# EAGLE board registers_half_layout (EAGLE 9.5.2)
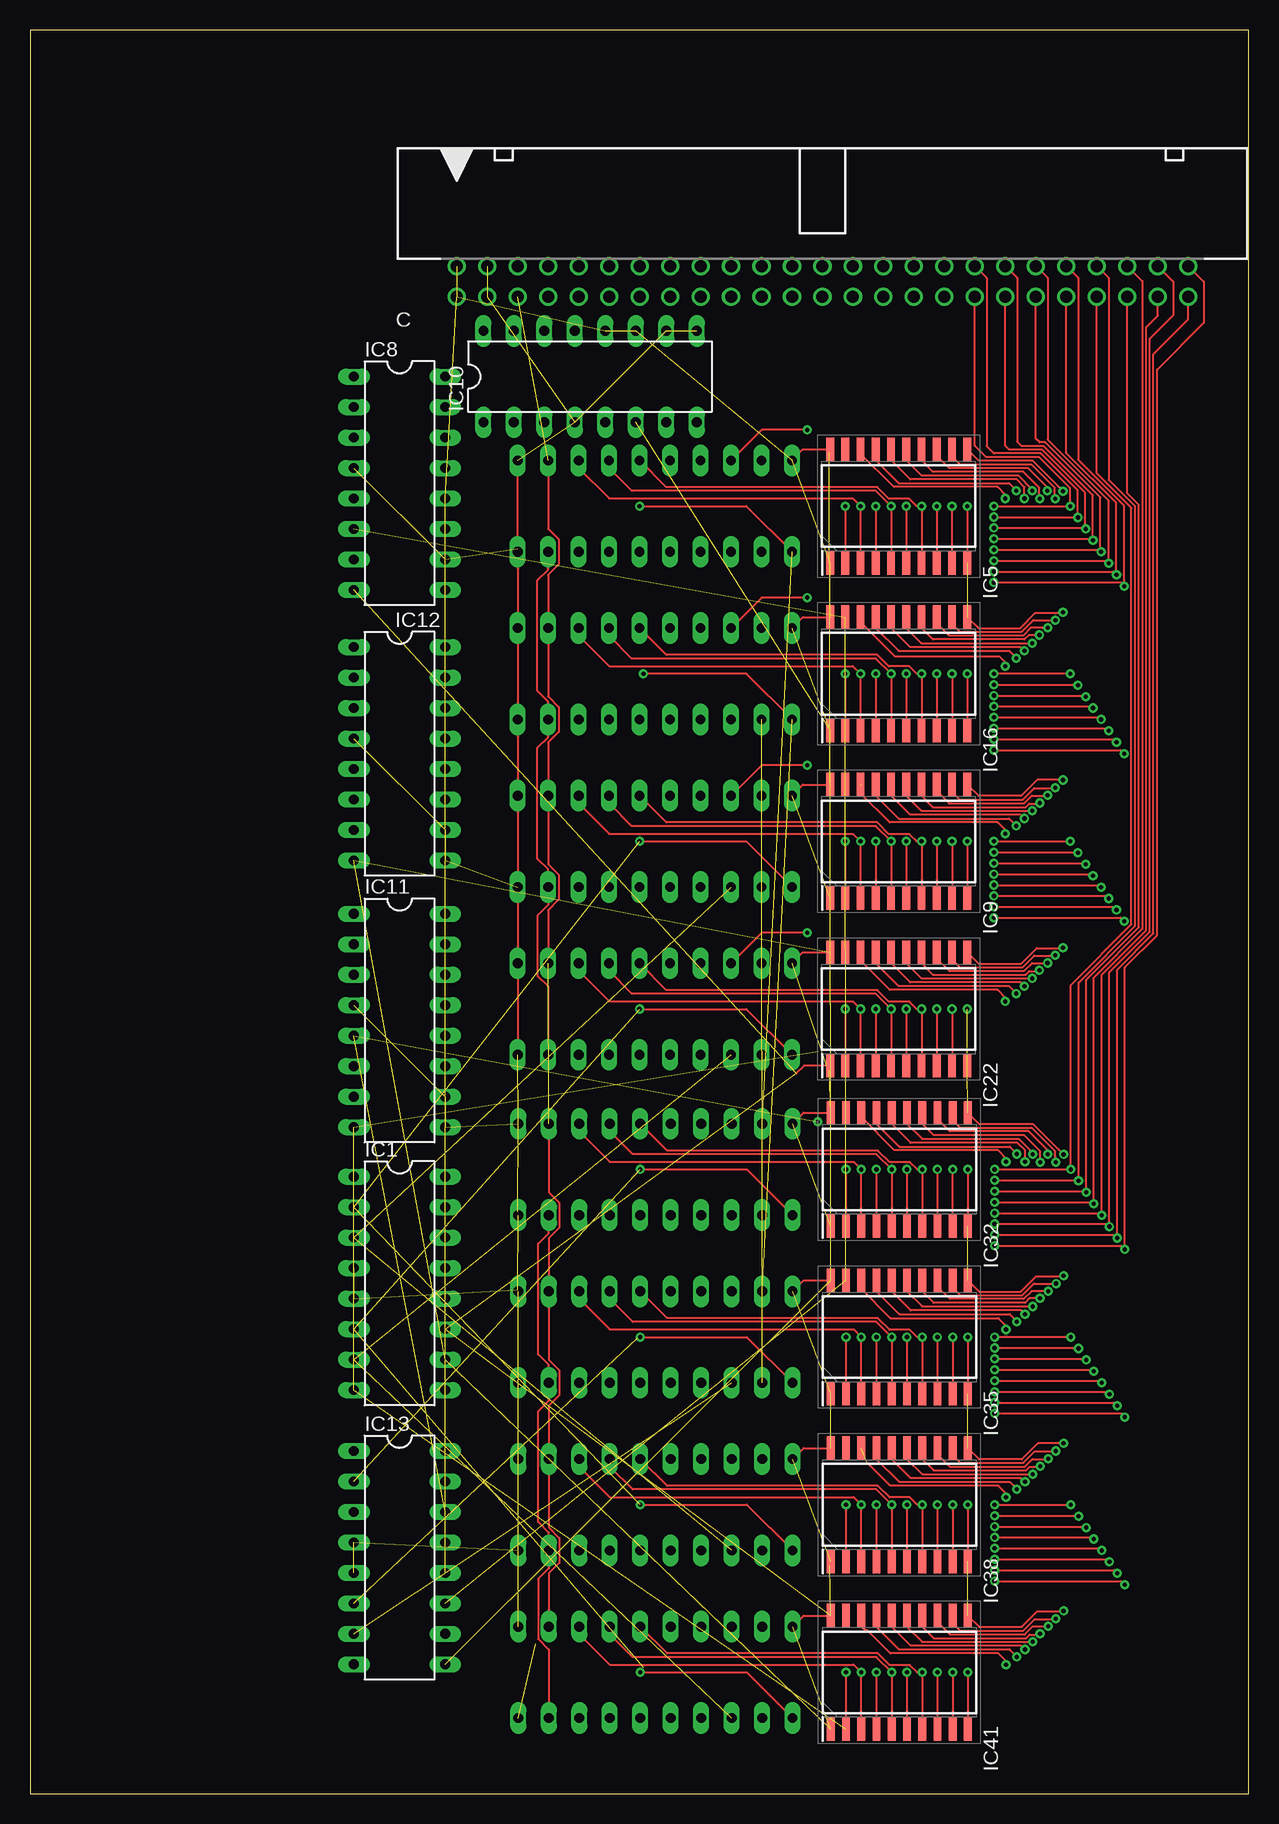
[diagram p0: board, top side]
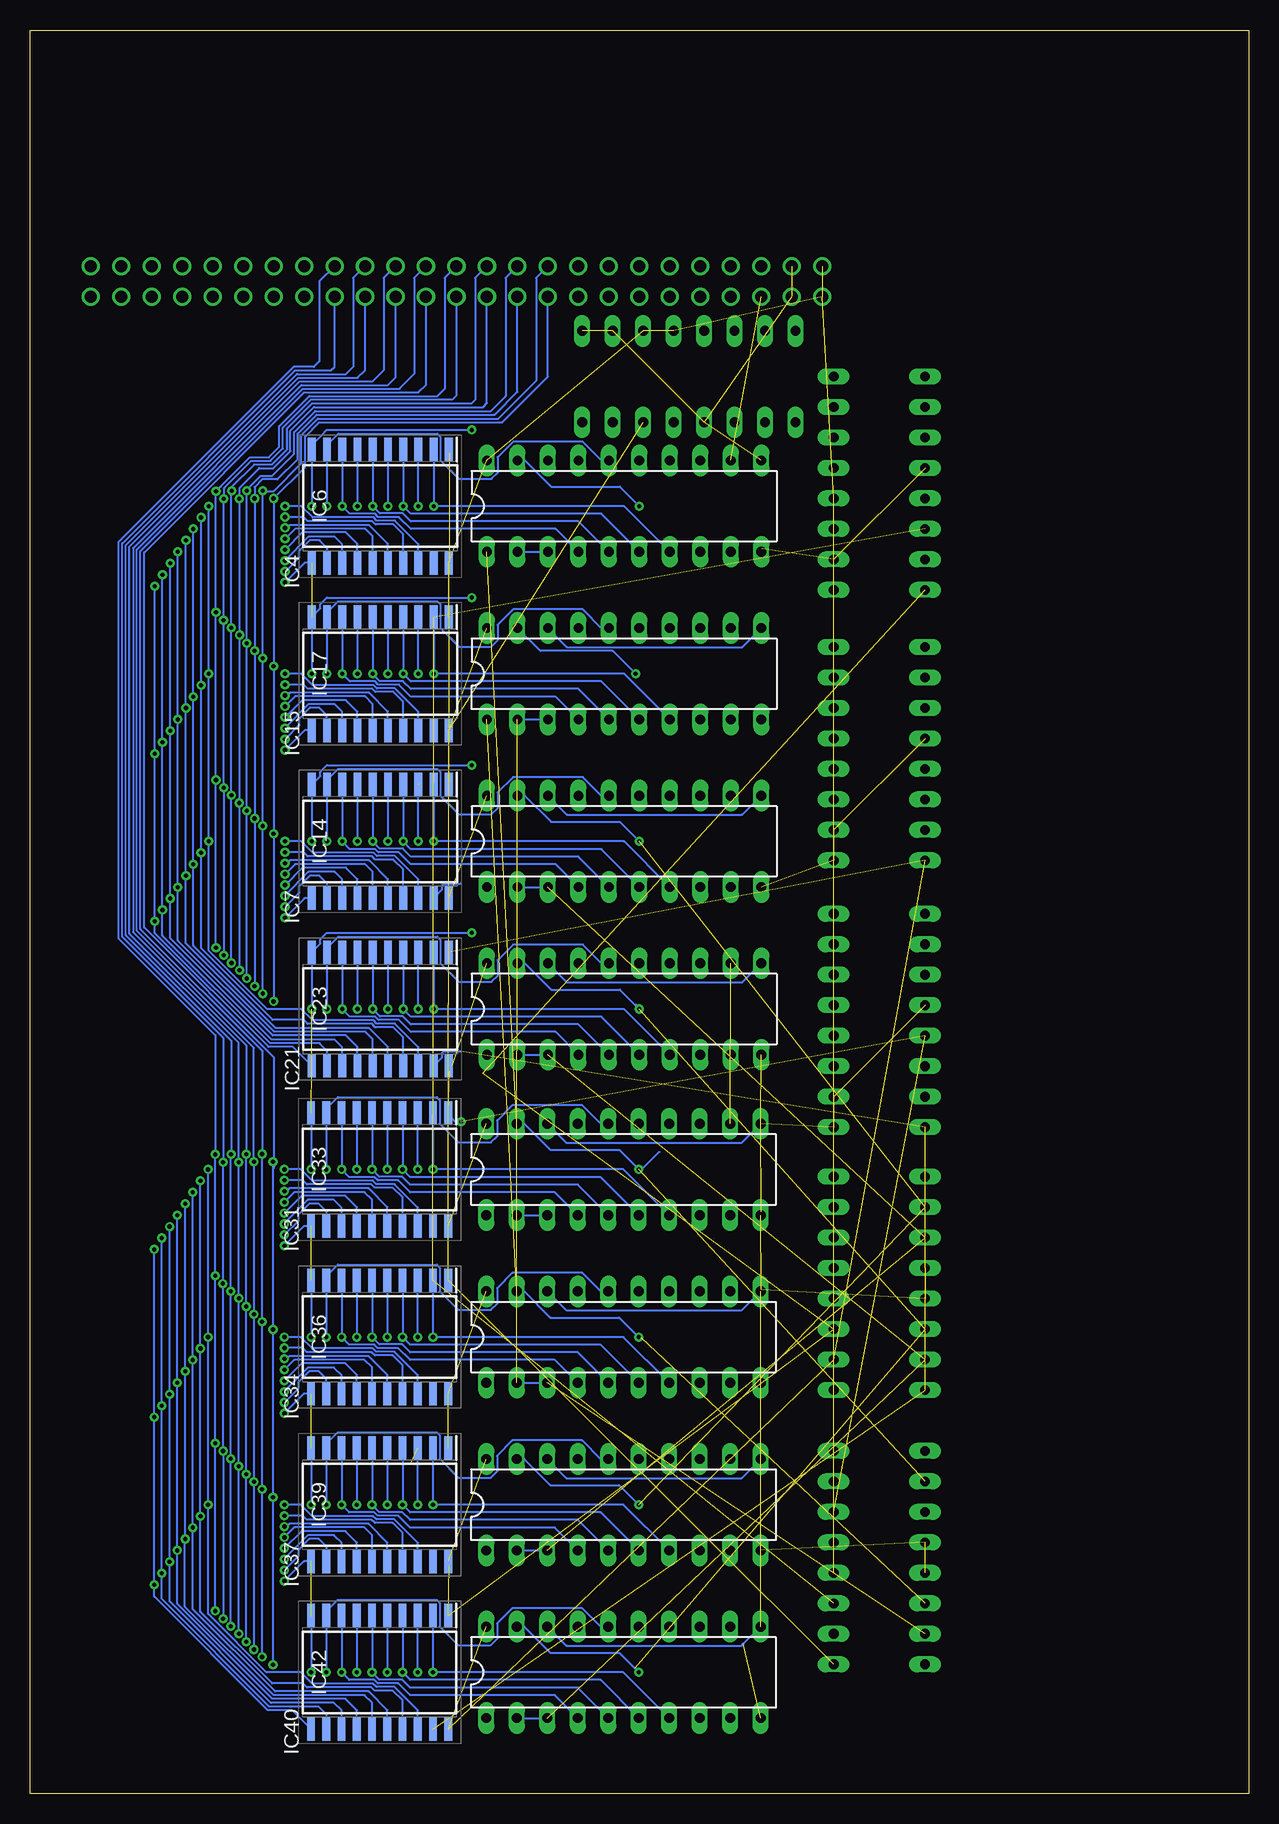
[diagram p1: board, bottom side, seen from below]

Size 101.58 x 146.99 mm. Coordinates in mm from the lower left corner, seen from the top.
Outline: 0,0 101.58,0 101.58,146.99 0,146.99 0,0
Copper layers (1*16): Top 0.035mm / dielectric 1.5mm / Bottom 0.035mm
Design rules "default *": minimum track width 6mil, minimum drill 0.35mm, track to track 6mil, track to pad 6mil, pad to pad 6mil, via to via 6mil, smd to smd 6mil, copper to edge 40mil, drill to drill 6mil, minimum pad ring 10mil, minimum via ring 8mil, stop-mask expansion 4mil, vias tented up to drill 0mil, thermal gap 10mil

## Footprints (pad centres in the part's own frame; a part is rotated, then mirrored left to right if it is on the bottom)
PAK100/2500-5-50 = drill 1 pad 1.422: 1 -30.48,-1.27; 2 -30.48,1.27; 3 -27.94,-1.27; 4 -27.94,1.27; 5 -25.4,-1.27; 6 -25.4,1.27; 7 -22.86,-1.27; 8 -22.86,1.27; 9 -20.32,-1.27; 10 -20.32,1.27; 11 -17.78,-1.27; 12 -17.78,1.27; 13 -15.24,-1.27; 14 -15.24,1.27; 15 -12.7,-1.27; 16 -12.7,1.27; 17 -10.16,-1.27; 18 -10.16,1.27; 19 -7.62,-1.27; 20 -7.62,1.27; 21 -5.08,-1.27; 22 -5.08,1.27; 23 -2.54,-1.27; 24 -2.54,1.27; 25 0,-1.27; 26 0,1.27; 27 2.54,-1.27; 28 2.54,1.27; 29 5.08,-1.27; 30 5.08,1.27; 31 7.62,-1.27; 32 7.62,1.27; 33 10.16,-1.27; 34 10.16,1.27; 35 12.7,-1.27; 36 12.7,1.27; 37 15.24,-1.27; 38 15.24,1.27; 39 17.78,-1.27; 40 17.78,1.27; 41 20.32,-1.27; 42 20.32,1.27; 43 22.86,-1.27; 44 22.86,1.27; 45 25.4,-1.27; 46 25.4,1.27; 47 27.94,-1.27; 48 27.94,1.27; 49 30.48,-1.27; 50 30.48,1.27
DIL16 = drill 0.813 long: 1 -8.89,-3.81; 2 -6.35,-3.81; 3 -3.81,-3.81; 4 -1.27,-3.81; 5 1.27,-3.81; 6 3.81,-3.81; 7 6.35,-3.81; 8 8.89,-3.81; 9 8.89,3.81; 10 6.35,3.81; 11 3.81,3.81; 12 1.27,3.81; 13 -1.27,3.81; 14 -3.81,3.81; 15 -6.35,3.81; 16 -8.89,3.81
DIL20 = drill 0.813 long: 1 -11.43,-3.81; 2 -8.89,-3.81; 3 -6.35,-3.81; 4 -3.81,-3.81; 5 -1.27,-3.81; 6 1.27,-3.81; 7 3.81,-3.81; 8 6.35,-3.81; 9 8.89,-3.81; 10 11.43,-3.81; 11 11.43,3.81; 12 8.89,3.81; 13 6.35,3.81; 14 3.81,3.81; 15 1.27,3.81; 16 -1.27,3.81; 17 -3.81,3.81; 18 -6.35,3.81; 19 -8.89,3.81; 20 -11.43,3.81
SOIC127P1030X265-20N = smd 1.95 x 0.65: 1 -4.725,5.715; 2 -4.725,4.445; 3 -4.725,3.175; 4 -4.725,1.905; 5 -4.725,0.635; 6 -4.725,-0.635; 7 -4.725,-1.905; 8 -4.725,-3.175; 9 -4.725,-4.445; 10 -4.725,-5.715; 11 4.725,-5.715; 12 4.725,-4.445; 13 4.725,-3.175; 14 4.725,-1.905; 15 4.725,-0.635; 16 4.725,0.635; 17 4.725,1.905; 18 4.725,3.175; 19 4.725,4.445; 20 4.725,5.715

## Placement (x,y rotation side)
C  2550-5  [PAK100/2500-5-50]  66.04,126.05 0 top
IC1  74AC11032  [DIL16]  30.8,42.55 270 top
IC4  74HCT299N  [DIL20]  52.07,107.31 0 bottom
IC5  SN74CBT3345DW  [SOIC127P1030X265-20N]  72.39,107.31 90 top
IC6  SN74CBT3345DW  [SOIC127P1030X265-20N]  72.39,107.31 270 bottom
IC7  74HCT299N  [DIL20]  52.07,79.38 0 bottom
IC8  74AC11138  [DIL16]  30.8,109.22 270 top
IC9  SN74CBT3345DW  [SOIC127P1030X265-20N]  72.39,79.38 90 top
IC10  74AC11238  [DIL16]  46.67,118.11 0 top
IC11  74AC11238  [DIL16]  30.8,64.45 270 top
IC12  74AC11138  [DIL16]  30.8,86.68 270 top
IC13  74AC11032  [DIL16]  30.8,19.68 270 top
IC14  SN74CBT3345DW  [SOIC127P1030X265-20N]  72.39,79.38 270 bottom
IC15  74HCT299N  [DIL20]  52.07,93.34 0 bottom
IC16  SN74CBT3345DW  [SOIC127P1030X265-20N]  72.39,93.34 90 top
IC17  SN74CBT3345DW  [SOIC127P1030X265-20N]  72.39,93.34 270 bottom
IC21  74HCT299N  [DIL20]  52.07,65.41 0 bottom
IC22  SN74CBT3345DW  [SOIC127P1030X265-20N]  72.39,65.41 90 top
IC23  SN74CBT3345DW  [SOIC127P1030X265-20N]  72.39,65.41 270 bottom
IC31  74HCT299N  [DIL20]  52.12,52.04 0 bottom
IC32  SN74CBT3345DW  [SOIC127P1030X265-20N]  72.44,52.04 90 top
IC33  SN74CBT3345DW  [SOIC127P1030X265-20N]  72.44,52.04 270 bottom
IC34  74HCT299N  [DIL20]  52.12,38.07 0 bottom
IC35  SN74CBT3345DW  [SOIC127P1030X265-20N]  72.44,38.07 90 top
IC36  SN74CBT3345DW  [SOIC127P1030X265-20N]  72.44,38.07 270 bottom
IC37  74HCT299N  [DIL20]  52.12,24.1 0 bottom
IC38  SN74CBT3345DW  [SOIC127P1030X265-20N]  72.44,24.1 90 top
IC39  SN74CBT3345DW  [SOIC127P1030X265-20N]  72.44,24.1 270 bottom
IC40  74HCT299N  [DIL20]  52.12,10.13 0 bottom
IC41  SN74CBT3345DW  [SOIC127P1030X265-20N]  72.44,10.13 90 top
IC42  SN74CBT3345DW  [SOIC127P1030X265-20N]  72.44,10.13 270 bottom

## Library data of the parts
C = con-3m; OC_FARNELL: 1788696; OC_NEWARK: unknown
IC1 IC8 IC10-IC13 = 74ac-logic
IC4 IC7 IC15 IC21 IC31 IC34 IC37 IC40 = 74xx-eu
IC5 IC6 IC9 IC14 IC16 IC17 IC22 IC23 IC32 IC33 IC35 IC36 IC38 IC39 IC41 IC42 = SamacSys_Parts; DESCRIPTION: Texas Instruments SN74CBT3345DW, Bus Switch, 8 x 1:1, 4.5 5.5 V, 20-Pin SOIC; HEIGHT: 2.65mm; MANUFACTURER_NAME: Texas Instruments; MANUFACTURER_PART_NUMBER: SN74CBT3345DW

## Nets
BUSA_BIT0: C.19 IC5.18 IC9.18 IC16.18 IC22.18
BUSA_BIT1: C.20 IC5.17 IC9.17 IC16.17 IC22.17
BUSA_BIT2: C.21 IC5.16 IC9.16 IC16.16 IC22.16
BUSA_BIT3: C.22 IC5.15 IC9.15 IC16.15 IC22.15
BUSA_BIT4: C.23 IC5.14 IC9.14 IC16.14 IC22.14
BUSA_BIT5: C.24 IC5.13 IC9.13 IC16.13 IC22.13
BUSA_BIT6: C.25 IC5.12 IC9.12 IC16.12 IC22.12
BUSA_BIT7: C.26 IC5.11 IC9.11 IC16.11 IC22.11
BUSA_BIT8: C.27 IC32.18 IC35.18 IC38.18 IC41.18
BUSA_BIT9: C.28 IC32.17 IC35.17 IC38.17 IC41.17
BUSA_BIT10: C.29 IC32.16 IC35.16 IC38.16 IC41.16
BUSA_BIT11: C.30 IC32.15 IC35.15 IC38.15 IC41.15
BUSA_BIT12: C.31 IC32.14 IC35.14 IC38.14 IC41.14
BUSA_BIT13: C.32 IC32.13 IC35.13 IC38.13 IC41.13
BUSA_BIT14: C.33 IC32.12 IC35.12 IC38.12 IC41.12
BUSA_BIT15: C.34 IC32.11 IC35.11 IC38.11 IC41.11
BUSA_REGIN0: C.7 IC8.15
BUSA_REGIN1: C.9 IC8.14
BUSA_REGIN2: C.11 IC8.13
BUSA_REGOUT0: C.13 IC10.15
BUSA_REGOUT1: C.15 IC10.14
BUSA_REGOUT2: C.17 IC10.13
BUSB_BIT0: C.35 IC6.18 IC14.18 IC17.18 IC23.18
BUSB_BIT1: C.36 IC6.17 IC14.17 IC17.17 IC23.17
BUSB_BIT2: C.37 IC6.16 IC14.16 IC17.16 IC23.16
BUSB_BIT3: C.38 IC6.15 IC14.15 IC17.15 IC23.15
BUSB_BIT4: C.39 IC6.14 IC14.14 IC17.14 IC23.14
BUSB_BIT5: C.40 IC6.13 IC14.13 IC17.13 IC23.13
BUSB_BIT6: C.41 IC6.12 IC14.12 IC17.12 IC23.12
BUSB_BIT7: C.42 IC6.11 IC14.11 IC17.11 IC23.11
BUSB_BIT8: C.43 IC33.18 IC36.18 IC39.18 IC42.18
BUSB_BIT9: C.44 IC33.17 IC36.17 IC39.17 IC42.17
BUSB_BIT10: C.45 IC33.16 IC36.16 IC39.16 IC42.16
BUSB_BIT11: C.46 IC33.15 IC36.15 IC39.15 IC42.15
BUSB_BIT12: C.47 IC33.14 IC36.14 IC39.14 IC42.14
BUSB_BIT13: C.48 IC33.13 IC36.13 IC39.13 IC42.13
BUSB_BIT14: C.49 IC33.12 IC36.12 IC39.12 IC42.12
BUSB_BIT15: C.50 IC33.11 IC36.11 IC39.11 IC42.11
BUSB_REGIN0: C.8 IC12.15
BUSB_REGIN1: C.10 IC12.14
BUSB_REGIN2: C.12 IC12.13
BUSB_REGOUT0: C.14 IC11.15
BUSB_REGOUT1: C.16 IC11.14
BUSB_REGOUT2: C.18 IC11.13
CLK: C.5 IC4.12 IC7.12 IC15.12 IC21.12 IC31.12 IC34.12 IC37.12 IC40.12
GND: C.3 C.4 IC1.4 IC1.5 IC4.10 IC4.11 IC4.18 IC5.10 IC6.10 IC7.10 IC7.11 IC7.18 IC8.4 IC8.9 IC8.10 IC9.10 IC10.4 IC10.9 IC10.10 IC11.4 IC11.9 IC11.10 IC12.4 IC12.9 IC12.10 IC13.4 IC13.5 IC14.10 IC15.10 IC15.11 IC15.18 IC16.10 IC17.10 IC21.10 IC21.11 IC21.18 IC22.10 IC23.10 IC31.10 IC31.11 IC31.18 IC32.10 IC33.10 IC34.10 IC34.11 IC34.18 IC35.10 IC36.10 IC37.10 IC37.11 IC37.18 IC38.10 IC39.10 IC40.10 IC40.11 IC40.18 IC41.10 IC42.10
N$1: IC34.16 IC35.9 IC36.9
N$2: IC1.8 IC11.8 IC23.19 IC42.19
N$5: IC4.7 IC5.2 IC6.2
N$6: IC4.13 IC5.3 IC6.3
N$7: IC4.6 IC5.4 IC6.4
N$8: IC4.14 IC5.5 IC6.5
N$9: IC4.5 IC5.6 IC6.6
N$10: IC4.15 IC5.7 IC6.7
N$11: IC4.4 IC5.8 IC6.8
N$15: IC4.16 IC5.9 IC6.9
N$22: IC7.7 IC9.2 IC14.2
N$23: IC7.13 IC9.3 IC14.3
N$24: IC7.6 IC9.4 IC14.4
N$25: IC7.14 IC9.5 IC14.5
N$28: IC7.5 IC9.6 IC14.6
N$34: IC5.1 IC10.5 IC13.15 IC32.1
N$35: IC7.15 IC9.7 IC14.7
N$36: IC7.4 IC9.8 IC14.8
N$37: IC7.16 IC9.9 IC14.9
N$41: IC15.7 IC16.2 IC17.2
N$42: IC15.13 IC16.3 IC17.3
N$43: IC15.6 IC16.4 IC17.4
N$44: IC15.14 IC16.5 IC17.5
N$45: IC15.5 IC16.6 IC17.6
N$46: IC15.15 IC16.7 IC17.7
N$47: IC15.4 IC16.8 IC17.8
N$48: IC15.16 IC16.9 IC17.9
N$63: IC21.7 IC22.2 IC23.2
N$64: IC21.13 IC22.3 IC23.3
N$65: IC21.6 IC22.4 IC23.4
N$66: IC21.14 IC22.5 IC23.5
N$67: IC21.5 IC22.6 IC23.6
N$68: IC21.15 IC22.7 IC23.7
N$69: IC21.4 IC22.8 IC23.8
N$70: IC21.16 IC22.9 IC23.9
N$120: IC5.19 IC8.5 IC13.1 IC32.19
N$121: IC31.7 IC32.2 IC33.2
N$122: IC31.13 IC32.3 IC33.3
N$124: IC6.19 IC12.5 IC13.16 IC33.19
N$125: IC31.6 IC32.4 IC33.4
N$126: IC31.14 IC32.5 IC33.5
N$127: IC4.2 IC4.3 IC13.3 IC31.2 IC31.3
N$128: IC4.1 IC4.19 IC13.2 IC31.1 IC31.19
N$129: IC31.5 IC32.6 IC33.6
N$130: IC31.15 IC32.7 IC33.7
N$131: IC31.4 IC32.8 IC33.8
N$132: IC31.16 IC32.9 IC33.9
N$133: IC34.7 IC35.2 IC36.2
N$134: IC34.13 IC35.3 IC36.3
N$135: IC34.6 IC35.4 IC36.4
N$136: IC34.14 IC35.5 IC36.5
N$137: IC13.7 IC15.2 IC15.3 IC34.2 IC34.3
N$138: IC13.6 IC15.1 IC15.19 IC34.1 IC34.19
N$139: IC34.5 IC35.6 IC36.6
N$140: IC34.15 IC35.7 IC36.7
N$141: IC34.4 IC35.8 IC36.8
N$143: IC37.7 IC38.2 IC39.2
N$144: IC37.13 IC38.3 IC39.3
N$145: IC37.6 IC38.4 IC39.4
N$146: IC37.14 IC38.5 IC39.5
N$147: IC1.3 IC7.2 IC7.3 IC37.2 IC37.3
N$148: IC1.2 IC7.1 IC7.19 IC37.1 IC37.19
N$149: IC37.5 IC38.6 IC39.6
N$150: IC37.15 IC38.7 IC39.7
N$151: IC37.4 IC38.8 IC39.8
N$152: IC37.16 IC38.9 IC39.9
N$153: IC40.7 IC41.2 IC42.2
N$154: IC40.13 IC41.3 IC42.3
N$155: IC40.6 IC41.4 IC42.4
N$156: IC40.14 IC41.5 IC42.5
N$157: IC1.7 IC21.2 IC21.3 IC40.2 IC40.3
N$158: IC1.6 IC21.1 IC21.19 IC40.1 IC40.19
N$159: IC40.5 IC41.6 IC42.6
N$160: IC40.15 IC41.7 IC42.7
N$161: IC40.4 IC41.8 IC42.8
N$162: IC40.16 IC41.9 IC42.9
N$163: IC6.1 IC11.5 IC13.14 IC33.1
N$167: IC8.6 IC13.11 IC16.19 IC35.19
N$168: IC12.6 IC13.10 IC17.19 IC36.19
N$169: IC10.6 IC13.9 IC16.1 IC36.1
N$170: IC11.6 IC13.8 IC17.1 IC35.1
N$171: IC1.1 IC8.7 IC9.1 IC38.1
N$172: IC1.16 IC12.7 IC14.1 IC39.1
N$173: IC1.15 IC9.19 IC10.7 IC38.19
N$174: IC1.14 IC11.7 IC14.19 IC39.19
N$176: IC1.9 IC10.8 IC22.19 IC41.19
N$178: IC1.10 IC12.8 IC23.1 IC41.1
N$207: IC1.11 IC8.8 IC22.1 IC42.1
STARTUP: C.6 IC4.9 IC7.9 IC15.9 IC21.9 IC31.9 IC34.9 IC37.9 IC40.9
VCC: C.1 C.2 IC1.12 IC1.13 IC4.20 IC5.20 IC6.20 IC7.20 IC8.11 IC8.12 IC9.20 IC10.11 IC10.12 IC11.11 IC11.12 IC12.11 IC12.12 IC13.12 IC13.13 IC14.20 IC15.20 IC16.20 IC17.20 IC21.20 IC22.20 IC23.20 IC31.20 IC32.20 IC33.20 IC34.20 IC35.20 IC36.20 IC37.20 IC38.20 IC39.20 IC40.20 IC41.20 IC42.20

## Tracks (layer width: path | path; a pad name or v marks a point on that pad's centre or on a via)
BUSA_BIT0  (via drill 0.35)  (1 unrouted)
  Top 0.152: v81.28,107.95 81.28,108.27 80.63,108.92 71.99,108.92 69.12,111.78 69.09,111.78 IC5.18 | v81.28,93.98 81.28,94.3 80.8,94.77 72.09,94.77 69.09,97.78 IC16.18 | v81.28,80.01 81.28,80.33 80.64,80.96 71.64,80.96 69.2,83.41 69.2,84.12 | v81.28,66.04 81.28,66.36 80.64,66.99 71.64,66.99 69.22,69.42 IC22.18
  Bottom 0.152: v81.28,66.04 v81.28,80.01 v81.28,93.98 v81.28,107.95 78.66,110.57 78.66,113.11 77.47,114.3 62.23,114.3 58.42,118.11 C.19
BUSA_BIT1  (via drill 0.35)
  Top 0.152: v82.19,108.6 82.19,108.63 81.6,109.22 72.39,109.22 70.48,111.12 IC5.17 | v82.19,94.63 82.19,94.66 81.6,95.25 72.39,95.25 70.48,97.16 IC16.17 | v82.19,80.66 82.19,80.69 81.6,81.28 72.39,81.28 70.48,83.19 IC9.17 | v82.19,66.69 82.19,66.72 81.6,67.31 72.39,67.31 70.48,69.22 IC22.17
  Bottom 0.152: v82.19,66.69 v82.19,80.66 v82.19,94.63 v82.19,108.6 82.14,108.56 81.28,108.56 78.96,110.87 78.96,113.24 77.59,114.61 62.55,114.61 59.4,117.75 59.4,126.33 C.20
BUSA_BIT2  (via drill 0.35)
  Top 0.152: v82.87,107.95 82.87,108.9 82.23,109.54 73.34,109.54 71.75,111.12 IC5.16 | v82.87,95.25 82.55,95.57 73.34,95.57 71.75,97.16 IC16.16 | v82.87,81.28 82.55,81.6 73.34,81.6 71.75,83.19 IC9.16 | v82.87,67.31 82.55,67.63 73.34,67.63 71.75,69.22 IC22.16
  Bottom 0.152: v82.87,67.31 v82.87,81.28 v82.87,95.25 v82.87,107.95 82.87,108.9 82.23,109.54 80.96,109.54 79.27,111.23 79.27,113.36 77.69,114.94 62.87,114.94 60.96,116.84 C.21
BUSA_BIT3  (via drill 0.35)
  Top 0.152: IC5.15 73.03,111.12 74.28,109.87 82.33,109.87 83.51,108.69 v83.51,108.59 | IC16.15 73.03,97.16 74.28,95.9 v83.5,95.9 v83.51,95.89 | IC9.15 73.03,83.19 74.28,81.93 v83.5,81.93 v83.51,81.92 | IC22.15 73.03,69.22 74.29,67.95 v83.51,67.95
  Bottom 0.152: C.22 61.94,126.33 61.94,116.48 63.18,115.24 77.82,115.24 79.57,113.49 79.57,111.68 81.41,109.84 82.36,109.84 83.51,108.69 v83.51,108.59 v83.51,95.89 v83.51,81.92 v83.51,67.95
BUSA_BIT4  (via drill 0.35, 0.35 pad 0.55)
  Top 0.152: IC5.14 74.3,111.12 75.25,110.17 82.79,110.17 84.12,108.84 84.12,107.94 v84.14,107.92 | IC16.14 74.3,97.16 75.25,96.2 82.87,96.2 83.24,96.57 v84.12,96.57 | IC9.14 74.3,83.19 75.25,82.23 82.96,82.23 83.26,82.53 84.1,82.53 v84.14,82.58 | IC22.14 74.3,69.22 75.25,68.26 82.96,68.26 83.26,68.56 84.05,68.56 v84.12,68.63
  Bottom 0.152: C.23 63.5,115.89 63.82,115.57 77.92,115.57 79.88,113.61 79.88,111.89 81.3,110.47 82.49,110.47 84.12,108.84 84.12,107.94 v84.14,107.92 84.12,107.9 v84.12,96.57 84.12,82.6 | v84.12,68.63 84.12,82.6 | v84.14,82.58 84.12,82.6
BUSA_BIT5  (via drill 0.35, 0.35 pad 0.55)
  Top 0.152: IC5.13 75.56,111.52 76.6,110.49 83.19,110.49 84.77,108.9 v84.77,108.58 | IC16.13 75.56,97.55 76.6,96.52 82.75,96.52 83.41,97.18 84.37,97.18 84.38,97.17 v84.81,97.17 | IC9.13 75.56,83.58 76.6,82.55 82.85,82.55 83.48,83.18 84.77,83.18 v84.8,83.21 | IC22.13 75.56,69.61 76.6,68.58 82.85,68.58 83.51,69.24 v84.8,69.24
  Bottom 0.152: C.24 64.48,126.33 64.48,116.17 64.78,115.88 78.05,115.88 80.18,113.74 80.18,112.02 81.43,110.77 82.9,110.77 84.8,108.88 84.8,96.84 | v84.8,69.24 v84.8,83.21 84.8,96.84 | 84.8,96.84 84.81,96.85 v84.81,97.17
BUSA_BIT6  (via drill 0.35, 0.35 pad 0.55)
  Top 0.152: IC5.12 76.83,111.43 77.47,110.8 83.42,110.8 85.38,108.84 85.38,107.98 v85.44,107.92 | IC16.12 76.83,97.46 77.47,96.83 82.63,96.83 83.61,97.81 v85.45,97.81 | IC9.12 76.83,83.49 77.47,82.86 82.72,82.86 83.68,83.81 85.4,83.81 v85.44,83.85 | IC22.12 76.83,69.52 77.47,68.89 82.72,68.89 83.68,69.84 85.4,69.84 v85.44,69.88
  Bottom 0.152: v85.44,69.88 v85.44,83.85 85.44,98.11 | v85.44,69.88 | 85.44,106.71 | 85.44,98.11 85.44,106.71 | 85.44,98.11 85.45,98.09 v85.45,97.81 | 85.44,106.71 v85.44,107.92 | v85.44,107.92 | v85.44,107.92 85.38,107.98 85.38,108.84 83.14,111.08 | 83.14,111.08 | C.25 66.04,116.52 66.38,116.18 78.17,116.18 80.51,113.85 80.51,112.12 81.55,111.08 83.03,111.08 83.14,111.08
BUSA_BIT7  (via drill 0.35, 0.35 pad 0.55)
  Top 0.152: IC5.11 79.05,111.1 83.55,111.1 83.99,110.66 85.68,108.96 v86.08,108.56 | IC9.11 79.05,83.16 82.6,83.16 83.93,84.49 v86.08,84.49 | IC22.11 79.05,69.19 82.6,69.19 83.89,70.49 86.05,70.49 v86.08,70.52 | IC16.11 79.05,97.13 82.5,97.13 83.78,98.41 86.03,98.41 v86.08,98.46 | v86.08,84.49
  Bottom 0.152: v86.08,70.52 v86.08,84.49 | v86.08,84.49 | v86.08,84.49 v86.08,98.46 | v86.08,98.46 | v86.08,108.56 | v86.08,98.46 v86.08,108.56 | v86.08,108.56 85.68,108.96 83.26,111.39 81.68,111.39 80.81,112.25 80.81,113.97 78.3,116.48 67.63,116.48 67.02,117.09 67.02,126.33 C.26
BUSA_BIT8  (via drill 0.35)  (1 unrouted)
  Top 0.152: v81.33,52.67 81.33,52.99 80.68,53.64 72.04,53.64 69.18,56.5 69.14,56.5 IC32.18 | v81.33,38.7 81.33,39.02 80.7,39.65 71.69,39.65 69.27,42.08 IC35.18 69.14,42.5 | v81.33,24.73 81.33,25.05 80.7,25.68 71.69,25.68 69.79,27.59 | v81.33,10.76 81.33,11.08 80.7,11.71 71.69,11.71 69.79,13.62 69.58,13.62 69.27,13.94 IC41.18 | 69.14,29 IC38.18
  Bottom 0.152: v81.33,52.67 81.33,52.07 | 81.33,52.07 v81.33,38.7 v81.33,24.73 v81.33,10.76 | C.27 68.58,117.42 69.22,116.79 78.71,116.79 92.08,103.43 92.08,72.2 81.28,61.41 81.28,52.12 81.33,52.07
BUSA_BIT9  (via drill 0.35)
  Top 0.152: v82.24,53.32 82.24,53.35 81.65,53.94 72.44,53.94 70.54,55.85 IC32.17 | v82.24,39.35 82.24,39.38 81.65,39.97 72.44,39.97 70.54,41.88 IC35.17 | v82.24,25.38 82.24,25.41 81.65,26 72.44,26 70.54,27.91 IC38.17 | v82.24,11.41 82.24,11.44 81.65,12.03 72.44,12.03 70.54,13.94 IC41.17
  Bottom 0.152: v82.24,11.41 v82.24,25.38 v82.24,39.35 82.24,53.02 | 82.24,53.02 v82.24,53.32 | C.28 69.56,126.33 69.56,118.33 70.8,117.09 78.84,117.09 92.38,103.55 92.38,72.06 82.23,61.91 82.23,53.03 82.24,53.02
BUSA_BIT10  (via drill 0.35)
  Top 0.152: v82.92,52.67 82.92,53.62 82.28,54.26 73.39,54.26 71.81,55.85 IC32.16 | v82.92,39.97 82.6,40.29 73.39,40.29 71.81,41.88 IC35.16 | v82.92,26 82.6,26.32 73.39,26.32 71.81,27.91 IC38.16 | v82.92,12.03 82.6,12.35 73.39,12.35 71.81,13.94 IC41.16
  Bottom 0.152: v82.92,12.03 v82.92,26 v82.92,39.97 v82.92,52.67 82.92,62.17 92.69,71.93 92.69,103.68 78.97,117.4 71.75,117.4 71.12,118.03 C.29
BUSA_BIT11  (via drill 0.35)
  Top 0.152: IC32.15 73.08,55.85 74.33,54.59 82.39,54.59 83.56,53.41 v83.56,53.31 | IC35.15 73.08,41.88 74.33,40.62 v83.56,40.62 v83.56,40.61 | IC38.15 73.08,27.91 74.33,26.65 v83.56,26.65 v83.56,26.64 | IC41.15 73.08,13.94 74.34,12.67 v83.56,12.67
  Bottom 0.152: v83.56,12.67 v83.56,26.64 v83.56,40.61 v83.56,53.31 83.56,62.38 92.99,71.81 92.99,103.81 79.09,117.7 73.03,117.7 72.1,118.63 72.1,126.33 C.30
BUSA_BIT12  (via drill 0.35, 0.35 pad 0.55)
  Top 0.152: IC32.14 74.35,55.85 75.3,54.89 82.84,54.89 84.17,53.56 84.17,52.66 v84.19,52.64 | IC35.14 74.35,41.88 75.3,40.92 82.92,40.92 83.29,41.29 v84.17,41.29 | IC38.14 74.35,27.91 75.3,26.95 83.01,26.95 83.31,27.25 84.15,27.25 v84.19,27.3 | IC41.14 74.35,13.94 75.3,12.98 83.01,12.98 83.31,13.28 84.1,13.28 v84.17,13.35
  Bottom 0.152: v84.17,13.35 84.17,27.32 | v84.19,27.3 84.17,27.32 | 84.17,27.32 v84.17,41.29 84.17,52.62 v84.19,52.64 84.19,62.58 93.29,71.68 93.29,103.93 79.22,118.01 74.3,118.01 73.66,118.64 C.31
BUSA_BIT13  (via drill 0.35, 0.35 pad 0.55)
  Top 0.152: IC32.13 75.62,56.24 76.65,55.21 83.24,55.21 84.82,53.62 v84.82,53.31 | IC35.13 75.62,42.27 76.65,41.24 82.81,41.24 83.46,41.9 84.42,41.9 84.43,41.89 v84.86,41.89 | IC38.13 75.62,28.3 76.65,27.27 82.9,27.27 83.53,27.9 84.82,27.9 v84.85,27.93 | IC41.13 75.62,14.34 76.65,13.3 82.9,13.3 83.56,13.96 v84.85,13.96
  Bottom 0.152: C.32 74.64,126.33 74.64,118.92 75.25,118.31 79.34,118.31 93.6,104.06 93.6,71.56 84.82,62.78 v84.82,53.31 84.86,53.27 v84.86,41.89 84.85,41.88 v84.85,27.93 v84.85,13.96
BUSA_BIT14  (via drill 0.35, 0.35 pad 0.55)
  Top 0.152: IC32.12 76.89,56.15 77.52,55.52 83.47,55.52 85.43,53.56 85.43,52.7 v85.49,52.64 | IC35.12 76.89,42.18 77.52,41.55 82.68,41.55 83.66,42.53 v85.5,42.53 | IC38.12 76.89,28.21 77.52,27.58 82.77,27.58 83.73,28.54 85.45,28.54 v85.49,28.57 | IC41.12 76.89,14.24 77.52,13.61 82.77,13.61 83.73,14.57 85.45,14.57 v85.49,14.6
  Bottom 0.152: v85.49,14.6 v85.49,28.57 85.49,42.83 | v85.49,14.6 | 85.49,51.43 | 85.49,42.83 85.49,51.43 | 85.49,42.83 85.5,42.81 v85.5,42.53 | 85.49,51.43 v85.49,52.64 | v85.49,52.64 | C.33 76.2,118.94 76.52,118.62 79.47,118.62 93.9,104.19 93.9,71.43 85.49,63.02 v85.49,52.64
BUSA_BIT15  (via drill 0.35, 0.35 pad 0.55)
  Top 0.152: IC32.11 79.1,55.82 83.6,55.82 85.74,53.68 v86.13,53.28 | IC38.11 79.1,27.88 82.65,27.88 83.98,29.21 v86.13,29.21 | IC41.11 79.1,13.91 82.65,13.91 83.94,15.21 86.1,15.21 v86.13,15.24 | IC35.11 79.1,41.85 82.55,41.85 83.84,43.13 86.08,43.13 v86.13,43.18 | v86.13,29.21
  Bottom 0.152: v86.13,15.24 v86.13,29.21 | v86.13,29.21 | v86.13,29.21 v86.13,43.18 | v86.13,43.18 | v86.13,53.28 | v86.13,43.18 v86.13,53.28 | C.34 77.47,126.05 77.47,119.38 77.93,118.92 79.6,118.92 94.21,104.31 94.21,71.3 86.13,63.23 v86.13,53.28
BUSB_BIT0  (via drill 0.35)
  Top 0.152: v80.33,107.31 v86.69,107.31 86.69,108.82 84.1,111.4 79.69,111.4 78.74,112.36 C.35 | v80.33,79.38 v86.69,79.38 | v86.69,93.34 v80.33,93.34
  Bottom 0.152: IC6.18 69.22,104.14 71.17,106.1 72.67,106.1 72.95,106.38 78.02,106.38 78.96,107.31 v80.33,107.31 | IC17.18 69.22,90.17 71.17,92.13 72.67,92.13 72.95,92.41 78.02,92.41 78.96,93.34 v80.33,93.34 | IC14.18 69.22,76.2 71.17,78.16 72.67,78.16 72.95,78.44 78.02,78.44 78.96,79.38 v80.33,79.38 | IC23.18 69.22,62.23 71.17,64.19 72.67,64.19 72.95,64.47 78.02,64.47 78.96,65.41 81.82,65.41 86.69,70.27 v86.69,79.38 86.69,93.03 | 86.69,93.03 v86.69,107.31 | v86.69,107.31 | 86.69,93.03 | 86.69,93.03 v86.69,93.34
BUSB_BIT1  (via drill 0.35, 0.35 pad 0.55)
  Top 0.152: v80.33,92.44 87.28,92.44 v87.33,92.39 | v80.33,78.47 87.28,78.47 v87.33,78.42 | v80.33,106.41 87.28,106.41 v87.33,106.36 87.29,106.39 87.29,108.64 84.22,111.71 80.33,111.71 79.72,112.31 79.72,126.33 C.36
  Bottom 0.152: v80.33,106.41 78.78,106.41 78.45,106.07 73.07,106.07 72.8,105.79 71.3,105.79 70.48,104.98 IC6.17 | v80.33,92.44 78.78,92.44 78.45,92.1 73.07,92.1 72.8,91.82 71.3,91.82 70.48,91.01 IC17.17 | v80.33,78.47 78.78,78.47 78.45,78.13 73.07,78.13 72.8,77.85 71.3,77.85 70.48,77.04 IC14.17 | IC23.17 70.48,63.07 71.3,63.88 72.8,63.88 73.07,64.16 78.45,64.16 78.78,64.5 81.35,64.5 87.33,70.47 v87.33,78.42 87.33,78.72 87.33,78.73 v87.33,92.39 v87.33,106.36
BUSB_BIT2  (via drill 0.35, 0.35 pad 0.55)
  Top 0.152: v80.33,77.56 87.88,77.56 v87.97,77.47 | v80.33,91.53 87.88,91.53 v87.97,91.44 | v80.33,105.5 87.88,105.5 v87.97,105.41 87.93,105.45 87.93,108.43 84.35,112.01 81.6,112.01 81.28,112.33 C.37
  Bottom 0.152: IC6.16 71.75,104.17 73.32,105.73 79.92,105.73 80.15,105.5 v80.33,105.5 | IC17.16 71.75,90.19 73.32,91.76 79.92,91.76 80.15,91.53 v80.33,91.53 | IC14.16 71.75,76.22 73.32,77.79 79.92,77.79 80.15,77.56 v80.33,77.56 | IC23.16 71.75,62.26 73.32,63.82 81.11,63.82 87.97,70.68 v87.97,77.47 v87.97,91.44 v87.97,105.41
BUSB_BIT3  (via drill 0.35, 0.35 pad 0.55)
  Top 0.152: v80.33,76.65 88.45,76.65 v88.58,76.52 | v80.33,90.62 88.45,90.62 v88.58,90.49 | v80.33,104.59 88.45,104.59 v88.58,104.46 88.58,108.22 84.48,112.32 82.63,112.32 82.26,112.68 82.26,126.33 C.38
  Bottom 0.152: v80.33,104.59 79.49,105.42 73.66,105.42 73.03,104.79 IC6.15 | v80.33,90.62 79.49,91.45 73.66,91.45 73.03,90.82 IC17.15 | v80.33,76.65 79.49,77.48 73.66,77.48 73.03,76.85 IC14.15 | IC23.15 73.03,62.88 73.66,63.51 81.23,63.51 88.61,70.89 88.61,76.49 v88.58,76.52 v88.58,90.49 v88.58,104.46
BUSB_BIT4  (via drill 0.35, 0.35 pad 0.55)
  Top 0.152: v80.33,89.71 89.08,89.71 v89.26,89.53 | v80.33,75.74 89.08,75.74 v89.26,75.56 | v80.33,103.68 89.08,103.68 v89.26,103.5 89.19,103.57 89.19,108.04 84.6,112.62 84.14,112.62 83.82,112.94 C.39
  Bottom 0.152: IC6.14 74.3,104.17 75.25,105.12 78.89,105.12 v80.33,103.68 | IC17.14 74.3,90.19 75.25,91.15 78.89,91.15 v80.33,89.71 | IC14.14 74.3,76.22 75.25,77.18 78.89,77.18 v80.33,75.74 | IC23.14 74.3,62.26 75.25,63.21 81.36,63.21 89.26,71.1 v89.26,75.56 v89.26,89.53 v89.26,103.5
BUSB_BIT5  (via drill 0.35, 0.35 pad 0.55)
  Top 0.152: v80.33,88.8 89.68,88.8 v89.9,88.58 | v80.33,74.83 89.68,74.83 v89.9,74.61 | v80.33,102.77 89.68,102.77 v89.9,102.55 89.9,107.76 84.8,112.86 84.8,126.33 C.40
  Bottom 0.152: IC6.13 75.56,104.14 76.2,104.78 78.37,104.78 80.33,102.82 v80.33,102.77 | IC17.13 75.56,90.17 76.2,90.81 78.37,90.81 80.33,88.85 v80.33,88.8 | IC14.13 75.56,76.2 76.2,76.83 78.37,76.83 80.33,74.88 v80.33,74.83 | IC23.13 75.56,62.23 76.2,62.87 81.45,62.87 89.9,71.32 v89.9,74.61 v89.9,88.58 v89.9,102.55
BUSB_BIT6  (via drill 0.35, 0.35 pad 0.55)
  Top 0.152: v80.33,73.92 90.28,73.92 v90.54,73.66 | v80.33,87.89 90.28,87.89 v90.54,87.63 | v80.33,101.86 90.28,101.86 v90.54,101.6 90.5,101.64 90.5,107.58 86.36,111.73 C.41
  Bottom 0.152: v80.33,101.86 79.14,103.05 79.14,103.58 78.25,104.47 77.47,104.47 76.83,103.83 IC6.12 | v80.33,87.89 79.14,89.08 79.14,89.61 78.25,90.5 77.47,90.5 76.83,89.86 IC17.12 | IC14.12 76.83,75.89 77.47,76.53 78.25,76.53 79.14,75.64 79.14,75.11 v80.33,73.92 | IC23.12 76.83,61.92 77.47,62.56 81.57,62.56 90.54,71.53 v90.54,73.66 v90.54,87.63 v90.54,101.6
BUSB_BIT7  (via drill 0.35, 0.35 pad 0.55)
  Top 0.152: v80.33,73.01 90.88,73.01 v91.18,72.71 | v80.33,86.98 90.88,86.98 v91.18,86.68 | v80.33,100.95 90.88,100.95 v91.18,100.65 91.18,107.34 87.34,111.18 87.34,126.33 C.42
  Bottom 0.152: IC6.11 78.7,102.59 80.33,100.97 v80.33,100.95 | IC17.11 78.7,88.62 80.33,87 v80.33,86.98 | IC14.11 78.7,74.65 80.33,73.03 v80.33,73.01 | v91.18,100.65 v91.18,86.68 v91.18,72.71 91.18,71.74 81.7,62.26 79.68,62.26 IC23.11
BUSB_BIT8  (via drill 0.35)
  Top 0.152: v80.38,52.04 v86.74,52.04 86.74,67.41 91.79,72.46 91.79,107.16 88.9,110.05 C.43 | v80.38,24.1 v86.74,24.1 | v86.74,38.07 v80.38,38.07
  Bottom 0.152: IC33.18 69.27,48.86 71.23,50.82 72.72,50.82 73,51.1 78.08,51.1 79.02,52.04 v80.38,52.04 | IC36.18 69.27,34.89 71.23,36.85 72.72,36.85 73,37.13 78.08,37.13 79.02,38.07 v80.38,38.07 | IC39.18 69.27,20.92 71.23,22.88 72.72,22.88 73,23.16 78.08,23.16 79.02,24.1 v80.38,24.1 | IC42.18 69.27,6.95 71.23,8.91 72.72,8.91 73,9.19 78.08,9.19 79.02,10.13 81.87,10.13 86.74,14.99 v86.74,24.1 86.74,37.75 | 86.74,37.75 v86.74,52.04 | v86.74,52.04 | 86.74,37.75 v86.74,38.07
BUSB_BIT9  (via drill 0.35, 0.35 pad 0.55)
  Top 0.152: v80.38,37.16 87.33,37.16 v87.38,37.11 | v80.38,23.19 87.34,23.19 v87.38,23.14 | v80.38,51.13 87.33,51.13 v87.38,51.08 87.38,67.61 92.09,72.33 92.09,107.29 89.88,109.5 89.88,126.33 C.44
  Bottom 0.152: v80.38,51.13 78.84,51.13 78.5,50.79 73.12,50.79 72.85,50.52 71.35,50.52 70.54,49.7 IC33.17 | v80.38,37.16 78.84,37.16 78.5,36.82 73.12,36.82 72.85,36.55 71.35,36.55 70.54,35.73 IC36.17 | v80.38,23.19 78.84,23.19 78.5,22.85 73.12,22.85 72.85,22.57 71.35,22.57 70.54,21.76 IC39.17 | IC42.17 70.54,7.79 71.35,8.61 72.85,8.61 73.12,8.88 78.5,8.88 78.84,9.22 81.41,9.22 87.38,15.19 v87.38,23.14 87.38,23.45 v87.38,37.11 v87.38,51.08
BUSB_BIT10  (via drill 0.35, 0.35 pad 0.55)
  Top 0.152: v80.38,22.28 87.94,22.28 v88.02,22.19 | v80.38,36.25 87.94,36.25 v88.02,36.16 | v80.38,50.22 87.94,50.22 v88.02,50.13 88.02,67.83 92.4,72.2 92.4,107.41 91.44,108.37 C.45
  Bottom 0.152: IC33.16 71.81,48.89 73.37,50.45 79.97,50.45 80.2,50.22 v80.38,50.22 | IC36.16 71.81,34.92 73.37,36.48 79.97,36.48 80.2,36.25 v80.38,36.25 | IC39.16 71.81,20.95 73.37,22.51 79.97,22.51 80.2,22.28 v80.38,22.28 | IC42.16 71.81,6.98 73.37,8.54 81.16,8.54 88.02,15.4 v88.02,22.19 v88.02,36.16 v88.02,50.13
BUSB_BIT11  (via drill 0.35, 0.35 pad 0.55)
  Top 0.152: v80.38,21.37 88.5,21.37 v88.63,21.24 | v80.38,35.34 88.5,35.34 v88.63,35.21 | v80.38,49.31 88.5,49.31 v88.63,49.18 88.63,68.01 92.7,72.08 92.7,126.05 C.46
  Bottom 0.152: v80.38,49.31 79.55,50.14 73.71,50.14 73.08,49.51 IC33.15 | v80.38,35.34 79.55,36.17 73.71,36.17 73.08,35.54 IC36.15 | v80.38,21.37 79.55,22.2 73.71,22.2 73.08,21.57 IC39.15 | IC42.15 73.08,7.6 73.71,8.23 81.28,8.23 88.67,15.61 88.67,21.21 v88.63,21.24 v88.63,35.21 v88.63,49.18
BUSB_BIT12  (via drill 0.35, 0.35 pad 0.55)
  Top 0.152: v80.38,34.43 89.13,34.43 v89.31,34.26 | v80.38,20.46 89.13,20.46 v89.31,20.29 | v80.38,48.4 89.13,48.4 v89.31,48.23 89.31,68.25 93.01,71.95 93.01,122.22 93.98,123.19 C.47
  Bottom 0.152: IC33.14 74.35,48.89 75.3,49.84 78.94,49.84 v80.38,48.4 | IC36.14 74.35,34.92 75.3,35.87 78.94,35.87 v80.38,34.43 | IC39.14 74.35,20.95 75.3,21.9 78.94,21.9 v80.38,20.46 | IC42.14 74.35,6.98 75.3,7.93 81.41,7.93 89.31,15.82 v89.31,20.29 v89.31,34.26 v89.31,48.23
BUSB_BIT13  (via drill 0.35, 0.35 pad 0.55)
  Top 0.152: v80.38,33.52 89.73,33.52 v89.95,33.3 | v80.38,19.55 89.73,19.55 v89.95,19.33 | v80.38,47.49 89.73,47.49 v89.95,47.27 89.95,68.46 93.31,71.83 93.31,121.25 95.28,123.22 95.28,126.02 C.48
  Bottom 0.152: IC33.13 75.62,48.86 76.25,49.5 78.43,49.5 80.38,47.54 v80.38,47.49 | IC36.13 75.62,34.89 76.25,35.53 78.43,35.53 80.38,33.57 v80.38,33.52 | IC39.13 75.62,20.92 76.25,21.56 78.43,21.56 80.38,19.6 v80.38,19.55 | IC42.13 75.62,6.95 76.25,7.59 81.5,7.59 89.95,16.04 v89.95,19.33 v89.95,33.3 v89.95,47.27
BUSB_BIT14  (via drill 0.35, 0.35 pad 0.55)
  Top 0.152: v80.38,18.64 90.33,18.64 v90.59,18.38 | v80.38,32.61 90.33,32.61 v90.59,32.35 | v80.38,46.58 90.33,46.58 v90.59,46.32 90.59,68.67 93.62,71.7 93.62,119.97 96.52,122.87 C.49
  Bottom 0.152: v80.38,46.58 79.19,47.77 79.19,48.3 78.3,49.19 77.52,49.19 76.89,48.56 IC33.12 | v80.38,32.61 79.19,33.8 79.19,34.33 78.3,35.22 77.52,35.22 76.89,34.59 IC36.12 | IC39.12 76.89,20.62 77.52,21.25 78.3,21.25 79.19,20.36 79.19,19.84 v80.38,18.64 | IC42.12 76.89,6.65 77.52,7.28 81.62,7.28 90.59,16.25 v90.59,18.38 v90.59,32.35 v90.59,46.32
BUSB_BIT15  (via drill 0.35, 0.35 pad 0.55)
  Top 0.152: v80.38,17.73 90.93,17.73 v91.23,17.43 | v80.38,31.7 90.93,31.7 v91.23,31.4 | v80.38,45.67 90.93,45.67 v91.23,45.37 91.23,68.88 93.92,71.57 93.92,118.69 97.82,122.58 97.82,126.02 C.50
  Bottom 0.152: IC33.11 78.75,47.31 80.38,45.69 v80.38,45.67 | IC36.11 78.75,33.34 80.38,31.72 v80.38,31.7 | IC39.11 78.75,19.37 80.38,17.75 v80.38,17.73 | v91.23,45.37 v91.23,31.4 v91.23,17.43 91.23,16.46 81.75,6.98 79.73,6.98 IC42.11
CLK  (2 unrouted)
  Top 0.152: IC4.12 43.18,105.42 44.07,104.53 44.07,102.48 43.18,101.59 IC15.12 43.18,91.45 44.07,90.56 44.07,88.51 43.18,87.62 IC7.12 43.18,77.48 44.07,76.59 44.07,74.54 43.18,73.65 IC21.12 | IC31.12 43.23,50.14 44.12,49.26 44.12,47.2 43.23,46.31 IC34.12 43.23,36.17 44.12,35.28 44.12,33.23 43.23,32.34 IC37.12 43.23,22.2 44.12,21.32 44.12,19.26 43.23,18.37 IC40.12
GND  (via drill 0.35)  (32 unrouted)
  Top 0.152: v64.77,113.67 60.96,113.67 IC4.18 | v78.11,107.31 IC5.10 | v78.11,93.34 IC16.10 | v78.11,79.38 IC9.10 | v64.77,99.69 60.96,99.69 IC15.18 | v64.77,85.72 60.96,85.72 IC7.18 | v64.77,71.75 60.96,71.75 IC21.18 | IC21.10 IC21.11 IC7.10 IC7.11 IC15.10 IC15.11 IC4.10 IC4.11 | v78.16,10.13 IC41.10 | v78.16,24.1 IC38.10 | v78.16,52.04 IC32.10 | v78.16,38.07 IC35.10
  Bottom 0.152: 77.39,113.11 77.31,113.19 | 77.31,113.19 76.83,113.67 v64.77,113.67 | v78.11,107.31 IC6.10 78.11,112.39 77.31,113.19 | v78.11,93.34 IC17.10 77.39,98.79 77.39,99.14 76.83,99.69 v64.77,99.69 | IC15.18 56.83,95.57 42.23,95.57 IC15.11 40.59,97.28 | IC7.18 56.83,81.6 42.23,81.6 IC7.11 | v78.11,79.38 IC14.10 77.39,84.82 77.39,85.17 76.83,85.72 v64.77,85.72 | IC21.18 56.83,67.63 42.23,67.63 42.08,67.77 | 42.08,67.77 IC21.11 | v78.11,65.41 IC23.10 77.39,70.85 77.39,71.2 76.83,71.75 v64.77,71.75 | 40.59,103.78 IC4.10 | 42.09,67.78 42.08,67.77 | 40.64,48.5 IC31.10 | IC42.10 v78.16,10.13 | IC40.18 56.88,12.35 42.28,12.35 42.14,12.49 | 42.14,12.49 IC40.11 | 42.14,12.5 42.14,12.49 | IC39.10 v78.16,24.1 | IC37.18 56.88,26.32 42.28,26.32 IC37.11 | IC34.18 56.88,40.29 42.28,40.29 IC34.11 40.64,42 | IC33.10 v78.16,52.04 | IC31.18 56.88,54.26 42.28,54.26 IC31.11 | IC36.10 v78.16,38.07
N$1  (via drill 0.35)
  Top 0.152: v76.89,38.07 IC35.9
  Bottom 0.152: v76.89,38.07 IC36.9 76.89,43.14 75.93,44.1 67.68,44.1 67.44,43.86 67.44,41.88 65.89,40.33 63.18,40.33 62.66,40.85 62.66,42.14 61.38,43.42 55.56,43.42 54.01,41.88 IC34.16
N$2  (3 unrouted)
  Bottom 0.152: IC23.19 67.23,61.4 67.23,61.75 67.09,61.88 65.71,61.88
N$5  (via drill 0.35)
  Top 0.152: v67.94,107.31 IC5.2
  Bottom 0.152: IC6.2 v67.94,107.31 52.07,107.31 IC4.7
N$6  (via drill 0.35)
  Top 0.152: IC5.3 v69.22,107.31 68.58,107.95 48.26,107.95 45.72,110.49 IC4.13
  Bottom 0.152: v69.22,107.31 IC6.3
N$7  (via drill 0.35)
  Top 0.152: v70.48,107.31 IC5.4
  Bottom 0.152: IC6.4 v70.48,107.31 69.85,106.68 53.98,106.68 IC4.6
N$8  (via drill 0.35)
  Top 0.152: IC5.5 v71.75,107.31 70.48,108.58 50.16,108.58 48.26,110.49 IC4.14
  Bottom 0.152: IC6.5 v71.75,107.31
N$9  (via drill 0.35)
  Top 0.152: v73.03,107.31 IC5.6
  Bottom 0.152: IC6.6 v73.03,107.31 72.42,106.71 70.51,106.71 69.85,106.05 55.88,106.05 IC4.5
N$10  (via drill 0.35)
  Top 0.152: IC5.7 v74.3,107.31 73.88,107.31 73.28,107.92 71.58,107.92 70.61,108.89 53.03,108.89 IC4.15
  Bottom 0.152: IC6.7 v74.3,107.31
N$11  (via drill 0.35)
  Top 0.152: v75.56,107.31 IC5.8
  Bottom 0.152: IC6.8 v75.56,107.31 74.93,106.68 72.82,106.68 72.54,106.4 70.84,106.4 69.85,105.41 57.78,105.41 IC4.4
N$15  (via drill 0.35)
  Top 0.152: IC5.9 v76.83,107.31
  Bottom 0.152: v76.83,107.31 IC6.9 76.83,112.39 75.88,113.35 67.63,113.35 67.39,113.11 67.39,111.13 65.83,109.58 63.13,109.58 62.61,110.1 62.61,111.39 61.33,112.67 55.51,112.67 53.96,111.12 IC4.16
N$22  (via drill 0.35)
  Top 0.152: v67.94,79.38 IC9.2
  Bottom 0.152: IC14.2 v67.94,79.38 52.07,79.38 IC7.7
N$23  (via drill 0.35)
  Top 0.152: IC9.3 v69.22,79.38 68.58,80.01 48.26,80.01 45.72,82.55 IC7.13
  Bottom 0.152: v69.22,79.38 IC14.3
N$24  (via drill 0.35)
  Top 0.152: v70.48,79.38 IC9.4
  Bottom 0.152: IC14.4 v70.48,79.38 69.85,78.74 53.98,78.74 IC7.6
N$25  (via drill 0.35)
  Top 0.152: IC9.5 v71.75,79.38 70.48,80.64 50.16,80.64 48.26,82.55 IC7.14
  Bottom 0.152: IC14.5 v71.75,79.38
N$28  (via drill 0.35)
  Top 0.152: v73.03,79.38 IC9.6
  Bottom 0.152: IC14.6 v73.03,79.38 72.42,78.77 70.51,78.77 69.85,78.11 55.88,78.11 IC7.5
N$35  (via drill 0.35)
  Top 0.152: IC9.7 v74.3,79.38 73.88,79.38 73.28,79.98 71.58,79.98 70.61,80.95 53.03,80.95 IC7.15
  Bottom 0.152: IC14.7 v74.3,79.38
N$36  (via drill 0.35)
  Top 0.152: v75.56,79.38 IC9.8
  Bottom 0.152: IC14.8 v75.56,79.38 74.93,78.74 72.82,78.74 72.54,78.46 70.84,78.46 69.85,77.47 57.78,77.47 IC7.4
N$37  (via drill 0.35)
  Top 0.152: v76.83,79.38 IC9.9
  Bottom 0.152: v76.83,79.38 IC14.9 76.83,84.45 75.88,85.41 67.63,85.41 67.39,85.17 67.39,83.19 65.83,81.64 63.13,81.64 62.61,82.16 62.61,83.45 61.33,84.73 55.51,84.73 53.96,83.19 IC7.16
N$41  (via drill 0.35)
  Top 0.152: v67.94,93.34 IC16.2
  Bottom 0.152: IC17.2 v67.94,93.34 52.07,93.34 IC15.7
N$42  (via drill 0.35)
  Top 0.152: IC16.3 v69.22,93.34 68.58,93.98 48.26,93.98 45.72,96.52 IC15.13
  Bottom 0.152: v69.22,93.34 IC17.3
N$43  (via drill 0.35)
  Top 0.152: v70.48,93.34 IC16.4
  Bottom 0.152: IC17.4 v70.48,93.34 69.85,92.71 53.98,92.71 IC15.6
N$44  (via drill 0.35)
  Top 0.152: IC16.5 v71.75,93.34 70.48,94.61 50.16,94.61 48.26,96.52 IC15.14
  Bottom 0.152: IC17.5 v71.75,93.34
N$45  (via drill 0.35)
  Top 0.152: v73.03,93.34 IC16.6
  Bottom 0.152: IC17.6 v73.03,93.34 72.42,92.74 70.51,92.74 69.85,92.08 55.88,92.08 IC15.5
N$46  (via drill 0.35)
  Top 0.152: IC16.7 v74.3,93.34 73.88,93.34 73.28,93.95 71.58,93.95 70.61,94.92 53.03,94.92 IC15.15
  Bottom 0.152: IC17.7 v74.3,93.34
N$47  (via drill 0.35)
  Top 0.152: v75.56,93.34 IC16.8
  Bottom 0.152: IC17.8 v75.56,93.34 74.93,92.71 72.82,92.71 72.54,92.43 70.84,92.43 69.85,91.44 57.78,91.44 IC15.4
N$48  (via drill 0.35)
  Top 0.152: v76.83,93.34 IC16.9
  Bottom 0.152: v76.83,93.34 IC17.9 76.83,98.42 75.88,99.38 67.63,99.38 67.39,99.14 67.39,97.16 65.83,95.61 63.13,95.61 62.61,96.13 62.61,97.42 61.33,98.7 55.51,98.7 53.96,97.16 IC15.16
N$63  (via drill 0.35)
  Top 0.152: v67.94,65.41 IC22.2
  Bottom 0.152: IC23.2 v67.94,65.41 52.07,65.41 IC21.7
N$64  (via drill 0.35)
  Top 0.152: IC22.3 v69.22,65.41 68.58,66.04 48.26,66.04 45.72,68.58 IC21.13
  Bottom 0.152: v69.22,65.41 IC23.3
N$65  (via drill 0.35)
  Top 0.152: v70.48,65.41 IC22.4
  Bottom 0.152: IC23.4 v70.48,65.41 69.85,64.77 53.98,64.77 IC21.6
N$66  (via drill 0.35)
  Top 0.152: IC22.5 v71.75,65.41 70.48,66.67 50.16,66.67 48.26,68.58 IC21.14
  Bottom 0.152: IC23.5 v71.75,65.41
N$67  (via drill 0.35)
  Top 0.152: v73.03,65.41 IC22.6
  Bottom 0.152: IC23.6 v73.03,65.41 72.42,64.8 70.51,64.8 69.85,64.14 55.88,64.14 IC21.5
N$68  (via drill 0.35)
  Top 0.152: IC22.7 v74.3,65.41 73.88,65.41 73.28,66.01 71.58,66.01 70.61,66.98 53.03,66.98 IC21.15
  Bottom 0.152: IC23.7 v74.3,65.41
N$69  (via drill 0.35)
  Top 0.152: v75.56,65.41 IC22.8
  Bottom 0.152: IC23.8 v75.56,65.41 74.93,64.77 72.82,64.77 72.54,64.49 70.84,64.49 69.85,63.5 57.78,63.5 IC21.4
N$70  (via drill 0.35)
  Top 0.152: v76.83,65.41 IC22.9
  Bottom 0.152: v76.83,65.41 IC23.9 76.83,70.48 75.88,71.44 67.63,71.44 67.39,71.2 67.39,69.22 65.83,67.67 63.13,67.67 62.61,68.19 62.61,69.48 61.33,70.76 55.51,70.76 53.96,69.22 IC21.16
N$121  (via drill 0.35)
  Top 0.152: v68,52.04 IC32.2
  Bottom 0.152: IC33.2 v68,52.04 52.12,52.04 IC31.7
N$122  (via drill 0.35)
  Top 0.152: IC32.3 v69.27,52.04 68.63,52.67 48.31,52.67 45.77,55.21 IC31.13
  Bottom 0.152: v69.27,52.04 IC33.3
N$125  (via drill 0.35)
  Top 0.152: v70.54,52.04 IC32.4
  Bottom 0.152: IC33.4 v70.54,52.04 69.9,51.4 54.03,51.4 IC31.6
N$126  (via drill 0.35)
  Top 0.152: IC32.5 v71.81,52.04 70.54,53.31 50.22,53.31 48.31,55.21 IC31.14
  Bottom 0.152: IC33.5 v71.81,52.04
N$127
  Bottom 0.152: IC4.2 IC4.3 | IC31.2 IC31.3
N$128  (via drill 0.35)  (2 unrouted)
  Top 0.152: v50.8,107.31 59.69,107.31 IC4.1 | v50.85,52.04 59.74,52.04 IC31.1
  Bottom 0.152: IC4.19 60.34,111.12 58.15,108.94 52.43,108.94 v50.8,107.31 50.59,107.28 | IC31.19 60.39,55.85 58.2,53.66 52.48,53.66 v50.85,52.04 50.64,52 49.14,53.5
N$129  (via drill 0.35)
  Top 0.152: v73.08,52.04 IC32.6
  Bottom 0.152: IC33.6 v73.08,52.04 72.47,51.43 70.56,51.43 69.9,50.77 55.93,50.77 IC31.5
N$130  (via drill 0.35)
  Top 0.152: IC32.7 v74.35,52.04 73.94,52.04 73.33,52.64 71.63,52.64 70.66,53.61 53.09,53.61 IC31.15
  Bottom 0.152: IC33.7 v74.35,52.04
N$131  (via drill 0.35)
  Top 0.152: v75.62,52.04 IC32.8
  Bottom 0.152: IC33.8 v75.62,52.04 74.98,51.4 72.87,51.4 72.6,51.12 70.89,51.12 69.9,50.13 57.84,50.13 IC31.4
N$132  (via drill 0.35)
  Top 0.152: IC32.9 v76.89,52.04
  Bottom 0.152: v76.89,52.04 IC33.9 76.89,57.11 75.93,58.07 67.68,58.07 67.44,57.83 67.44,55.85 65.89,54.3 63.18,54.3 62.66,54.82 62.66,56.11 61.38,57.4 55.56,57.4 54.01,55.85 IC31.16
N$133  (via drill 0.35)
  Top 0.152: v68,38.07 IC35.2
  Bottom 0.152: IC36.2 v68,38.07 52.12,38.07 IC34.7
N$134  (via drill 0.35)
  Top 0.152: IC35.3 v69.27,38.07 68.63,38.7 48.31,38.7 45.77,41.24 IC34.13
  Bottom 0.152: v69.27,38.07 IC36.3
N$135  (via drill 0.35)
  Top 0.152: v70.54,38.07 IC35.4
  Bottom 0.152: IC36.4 v70.54,38.07 69.9,37.43 54.03,37.43 IC34.6
N$136  (via drill 0.35)
  Top 0.152: IC35.5 v71.81,38.07 70.54,39.34 50.22,39.34 48.31,41.24 IC34.14
  Bottom 0.152: IC36.5 v71.81,38.07
N$137  (2 unrouted)
  Bottom 0.152: IC15.2 IC15.3 | IC34.2 IC34.3
N$138  (via drill 0.35, 0.35 pad 0.55)  (2 unrouted)
  Top 0.152: IC15.1 59.69,93.34 v51.12,93.34 | v50.85,38.07 59.74,38.07 IC34.1
  Bottom 0.152: v51.12,93.34 53.02,95.25 59.05,95.25 IC15.19 | IC34.19 60.39,41.88 58.2,39.69 52.48,39.69 v50.85,38.07 50.64,38
N$139  (via drill 0.35)
  Top 0.152: v73.08,38.07 IC35.6
  Bottom 0.152: IC36.6 v73.08,38.07 72.47,37.46 70.56,37.46 69.9,36.8 55.93,36.8 IC34.5
N$140  (via drill 0.35)
  Top 0.152: IC35.7 v74.35,38.07 73.94,38.07 73.33,38.67 71.63,38.67 70.66,39.64 53.09,39.64 IC34.15
  Bottom 0.152: IC36.7 v74.35,38.07
N$141  (via drill 0.35)
  Top 0.152: v75.62,38.07 IC35.8
  Bottom 0.152: IC36.8 v75.62,38.07 74.98,37.43 72.87,37.43 72.6,37.15 70.89,37.15 69.9,36.16 57.84,36.16 IC34.4
N$143  (via drill 0.35)
  Top 0.152: v68,24.1 IC38.2
  Bottom 0.152: IC39.2 v68,24.1 52.12,24.1 IC37.7
N$144  (via drill 0.35)
  Top 0.152: IC38.3 v69.27,24.1 68.63,24.73 48.31,24.73 45.77,27.27 IC37.13
  Bottom 0.152: v69.27,24.1 IC39.3
N$145  (via drill 0.35)
  Top 0.152: v70.54,24.1 IC38.4
  Bottom 0.152: IC39.4 v70.54,24.1 69.9,23.46 54.03,23.46 IC37.6
N$146  (via drill 0.35)
  Top 0.152: IC38.5 v71.81,24.1 70.54,25.37 50.22,25.37 48.31,27.27 IC37.14
  Bottom 0.152: IC39.5 v71.81,24.1
N$147  (2 unrouted)
  Bottom 0.152: IC7.2 IC7.3 | IC37.2 IC37.3
N$148  (via drill 0.35)  (2 unrouted)
  Top 0.152: v50.8,79.38 59.69,79.38 IC7.1 | v50.85,24.1 59.74,24.1 IC37.1
  Bottom 0.152: IC7.19 60.34,83.19 58.15,81 52.43,81 v50.8,79.38 | IC37.19 60.39,27.91 58.2,25.72 52.48,25.72 v50.85,24.1
N$149  (via drill 0.35)
  Top 0.152: v73.08,24.1 IC38.6
  Bottom 0.152: IC39.6 v73.08,24.1 72.47,23.49 70.56,23.49 69.9,22.83 55.93,22.83 IC37.5
N$150  (via drill 0.35)
  Top 0.152: IC38.7 v74.35,24.1 73.94,24.1 73.33,24.7 71.63,24.7 70.66,25.67 53.09,25.67 IC37.15
  Bottom 0.152: IC39.7 v74.35,24.1
N$151  (via drill 0.35)
  Top 0.152: v75.62,24.1 IC38.8
  Bottom 0.152: IC39.8 v75.62,24.1 74.98,23.46 72.87,23.46 72.6,23.18 70.89,23.18 69.9,22.19 57.84,22.19 IC37.4
N$152  (via drill 0.35)
  Top 0.152: v76.89,24.1 IC38.9
  Bottom 0.152: v76.89,24.1 IC39.9 76.89,29.17 75.93,30.13 67.68,30.13 67.44,29.89 67.44,27.91 65.89,26.36 63.18,26.36 62.66,26.88 62.66,28.17 61.38,29.45 55.56,29.45 54.01,27.91 IC37.16
N$153  (via drill 0.35)
  Top 0.152: v68,10.13 IC41.2
  Bottom 0.152: IC42.2 v68,10.13 52.12,10.13 IC40.7
N$154  (via drill 0.35)
  Top 0.152: IC41.3 v69.27,10.13 68.63,10.76 48.31,10.76 45.77,13.3 IC40.13
  Bottom 0.152: v69.27,10.13 IC42.3
N$155  (via drill 0.35)
  Top 0.152: v70.54,10.13 IC41.4
  Bottom 0.152: IC42.4 v70.54,10.13 69.9,9.49 54.03,9.49 IC40.6
N$156  (via drill 0.35)
  Top 0.152: IC41.5 v71.81,10.13 70.54,11.4 50.22,11.4 48.31,13.3 IC40.14
  Bottom 0.152: IC42.5 v71.81,10.13
N$157  (2 unrouted)
  Bottom 0.152: IC21.2 IC21.3 | IC40.2 IC40.3
N$158  (via drill 0.35)  (2 unrouted)
  Top 0.152: v50.8,65.41 59.69,65.41 IC21.1 | v50.85,10.13 59.74,10.13 IC40.1
  Bottom 0.152: IC21.19 60.34,69.22 58.15,67.03 52.43,67.03 51.13,65.74 | 51.13,65.74 v50.8,65.41 | 51.09,65.78 51.13,65.74 | IC40.19 60.39,13.94 58.2,11.75 52.48,11.75 51.18,10.46 | 51.18,10.46 v50.85,10.13 | 51.14,10.5 51.18,10.46
N$159  (via drill 0.35)
  Top 0.152: v73.08,10.13 IC41.6
  Bottom 0.152: IC42.6 v73.08,10.13 72.47,9.52 70.56,9.52 69.9,8.86 55.93,8.86 IC40.5
N$160  (via drill 0.35)
  Top 0.152: IC41.7 v74.35,10.13 73.94,10.13 73.33,10.73 71.63,10.73 70.66,11.7 53.09,11.7 IC40.15
  Bottom 0.152: IC42.7 v74.35,10.13
N$161  (via drill 0.35)
  Top 0.152: v75.62,10.13 IC41.8
  Bottom 0.152: IC42.8 v75.62,10.13 74.98,9.49 72.87,9.49 72.6,9.21 70.89,9.21 69.9,8.22 57.84,8.22 IC40.4
N$162  (via drill 0.35)
  Top 0.152: v76.89,10.13 IC41.9
  Bottom 0.152: v76.89,10.13 IC42.9 76.89,15.2 75.93,16.16 67.68,16.16 67.44,15.92 67.44,13.94 65.89,12.39 63.18,12.39 62.66,12.91 62.66,14.2 61.38,15.48 55.56,15.48 54.01,13.94 IC40.16
N$163  (via drill 0.35)  (3 unrouted)
  Bottom 0.152: v65.64,56 66.14,56 66.64,56.5 IC33.1 | 66.59,111.78 IC6.1
N$167  (3 unrouted)
N$169  (3 unrouted)
N$174
  Bottom 0.152: IC14.19 67.23,75.37 67.23,75.72 67.09,75.85 65.71,75.85
N$178  (3 unrouted)
N$207  (3 unrouted)
  Top 0.152: 63.87,60.05 64.5,60.68 IC22.1 66.59,60.28 66.59,59.78
STARTUP
  Top 0.152: IC21.9 43.18,67.3 42.29,68.19 42.29,73.19 43.18,74.08 IC7.9 43.18,77.05 42.29,77.94 42.29,87.16 43.18,88.05 IC15.9 43.18,91.02 42.29,91.91 42.29,101.13 43.18,102.02 IC4.9 | IC40.9 43.23,12.02 42.34,12.91 42.34,17.91 43.23,18.8 IC37.9 43.23,21.77 42.34,22.66 42.34,31.88 43.23,32.77 IC34.9 43.23,35.74 42.34,36.63 42.34,45.85 43.23,46.74 IC31.9
  Bottom 0.152: 43.59,61.28 IC21.9 | 43.64,6 IC40.9
VCC  (29 unrouted)
  Top 0.152: IC15.20 64.42,98.07 IC16.20 | IC7.20 64.42,84.1 IC9.20 | IC21.20 64.42,70.13 IC22.20 66.67,69.85 | IC4.20 64.42,112.04 IC5.20 | IC34.20 64.47,42.79 IC35.20 66.73,42.51 | IC37.20 64.47,28.82 IC38.20 66.73,28.54 | IC40.20 64.47,14.85 IC41.20 66.73,14.57 | IC31.20 64.47,56.76 IC32.20
  Bottom 0.152: 66.39,60.68 IC23.20 66.59,60.28 | 66.64,5 IC42.20 | 66.64,19 IC39.20